# Altium PCB Dekor Natal.PcbDoc (part 1 of 2)
Units mm, origin at the board's own origin, x right, y up, seen from the top; angles counter-clockwise.
Board outline 200 x 100 mm, 4 copper layers (Top Layer, Internal Plane 1, Internal Plane 2, Bottom Layer), stack 0.462 mm thick; 210 components, 0 nets, 807 pads, 0 vias.
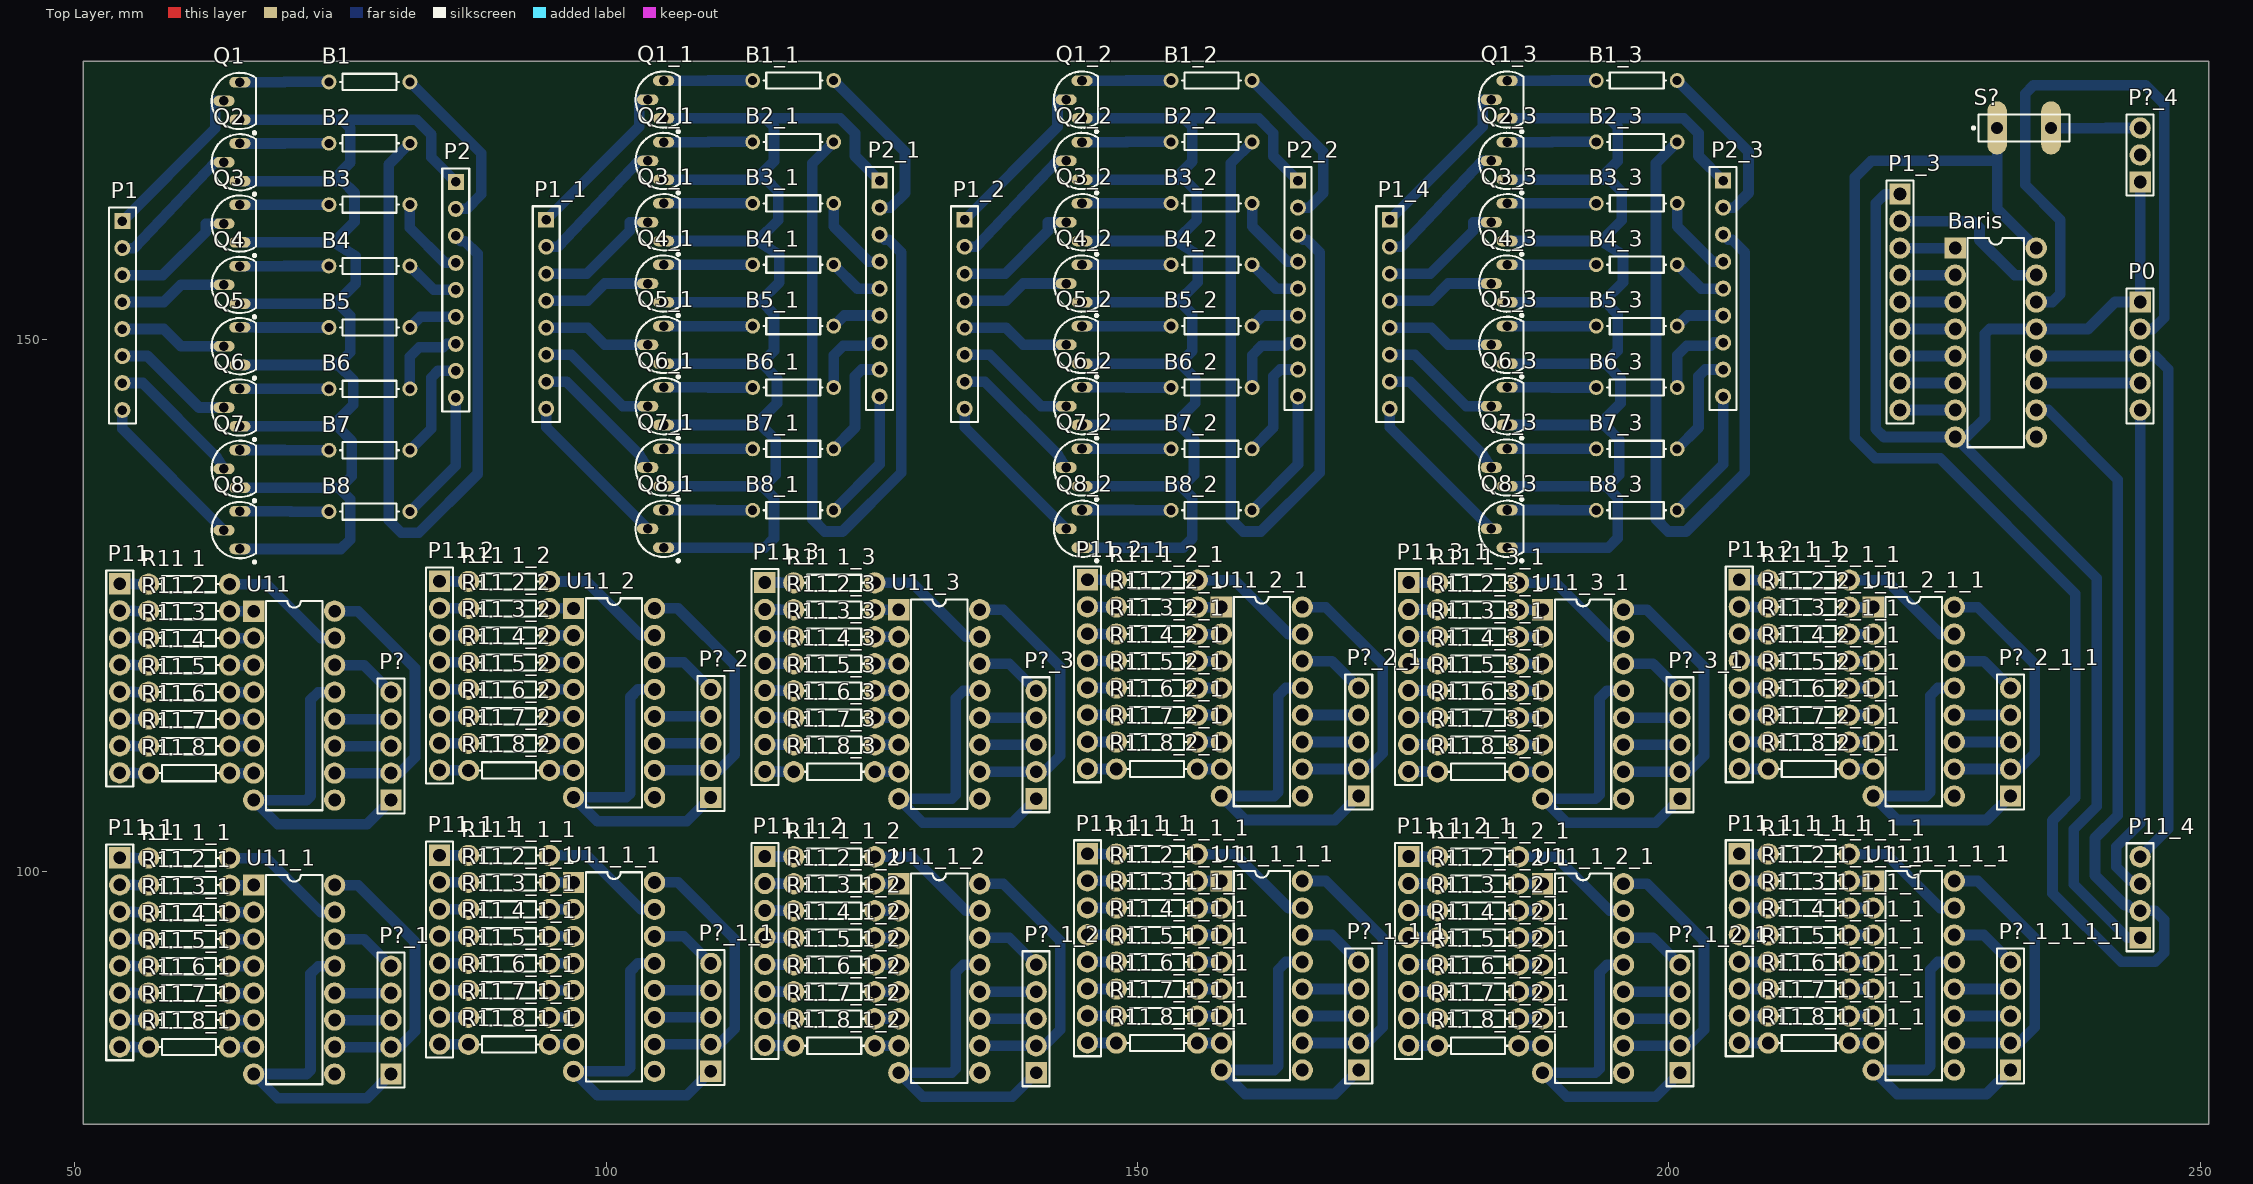
[diagram p0: Top Layer view]
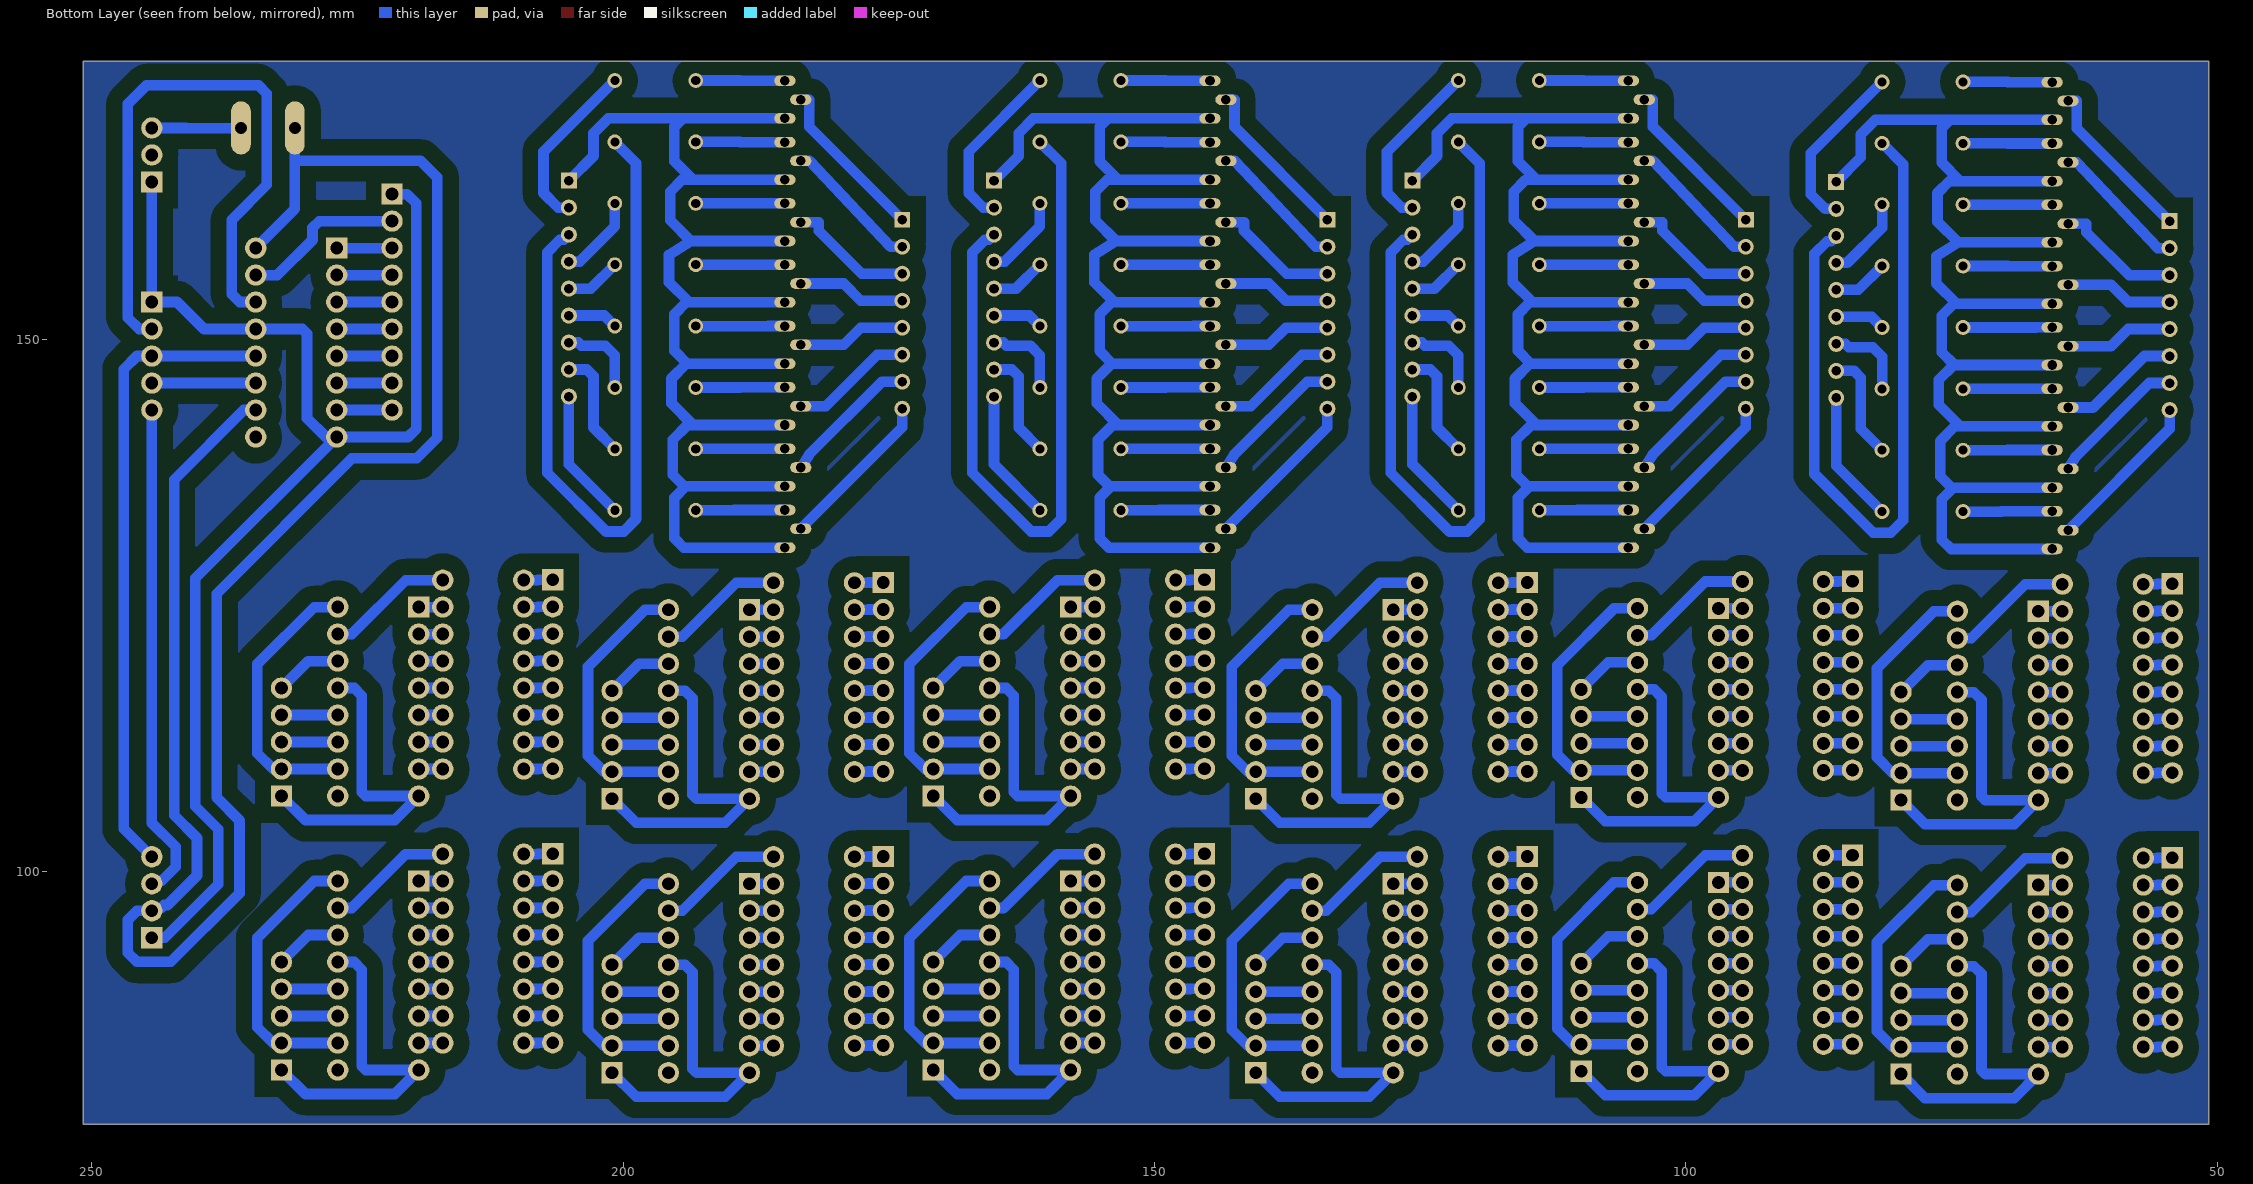
[diagram p1: Bottom Layer view, seen from below]
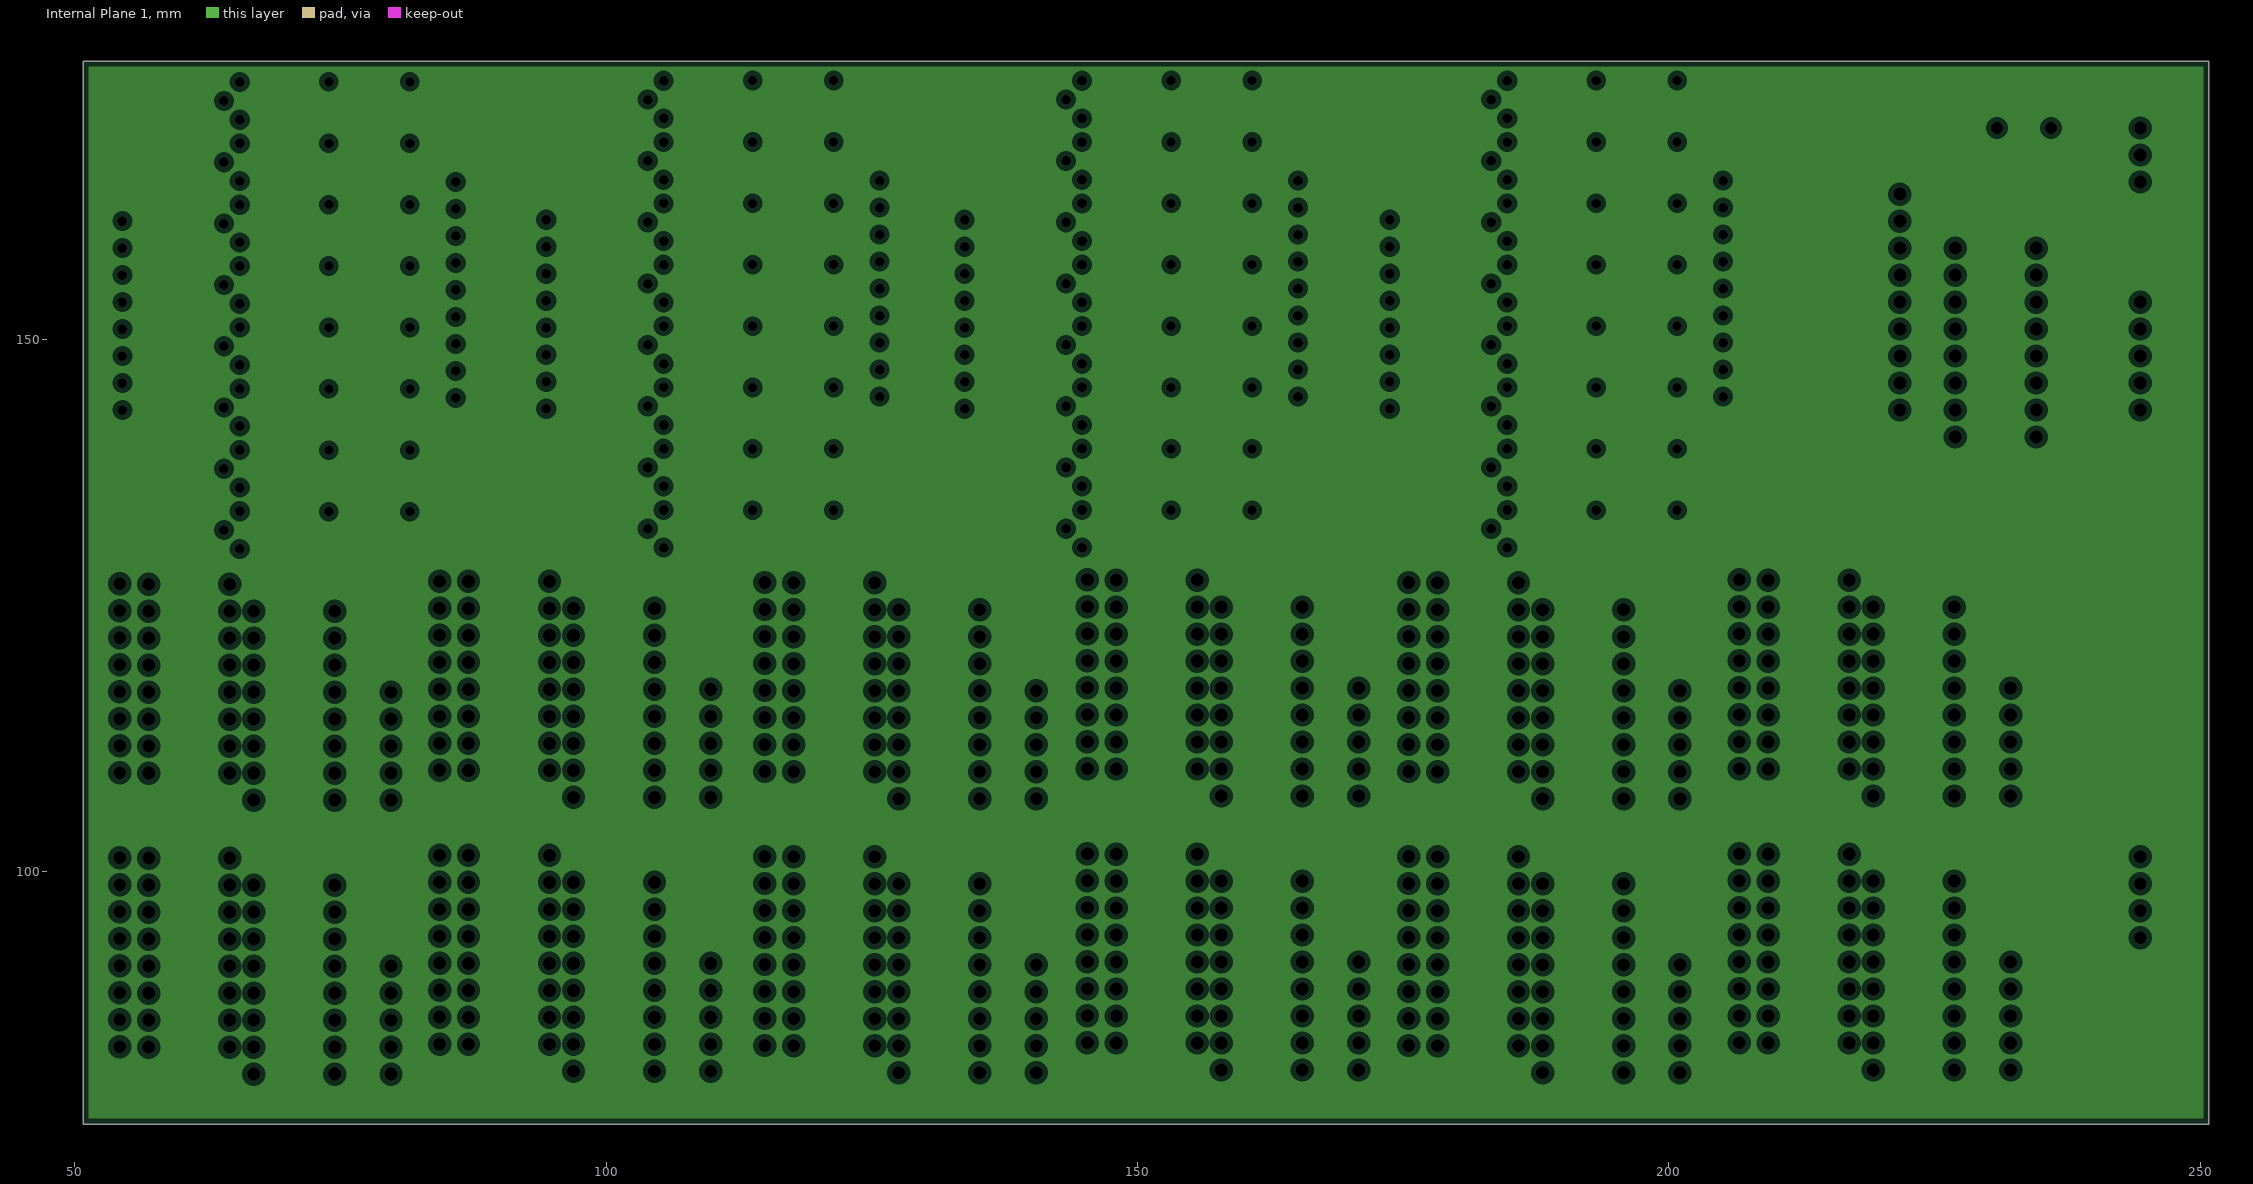
[diagram p2: Internal Plane 1, clearances drawn from the general rule]
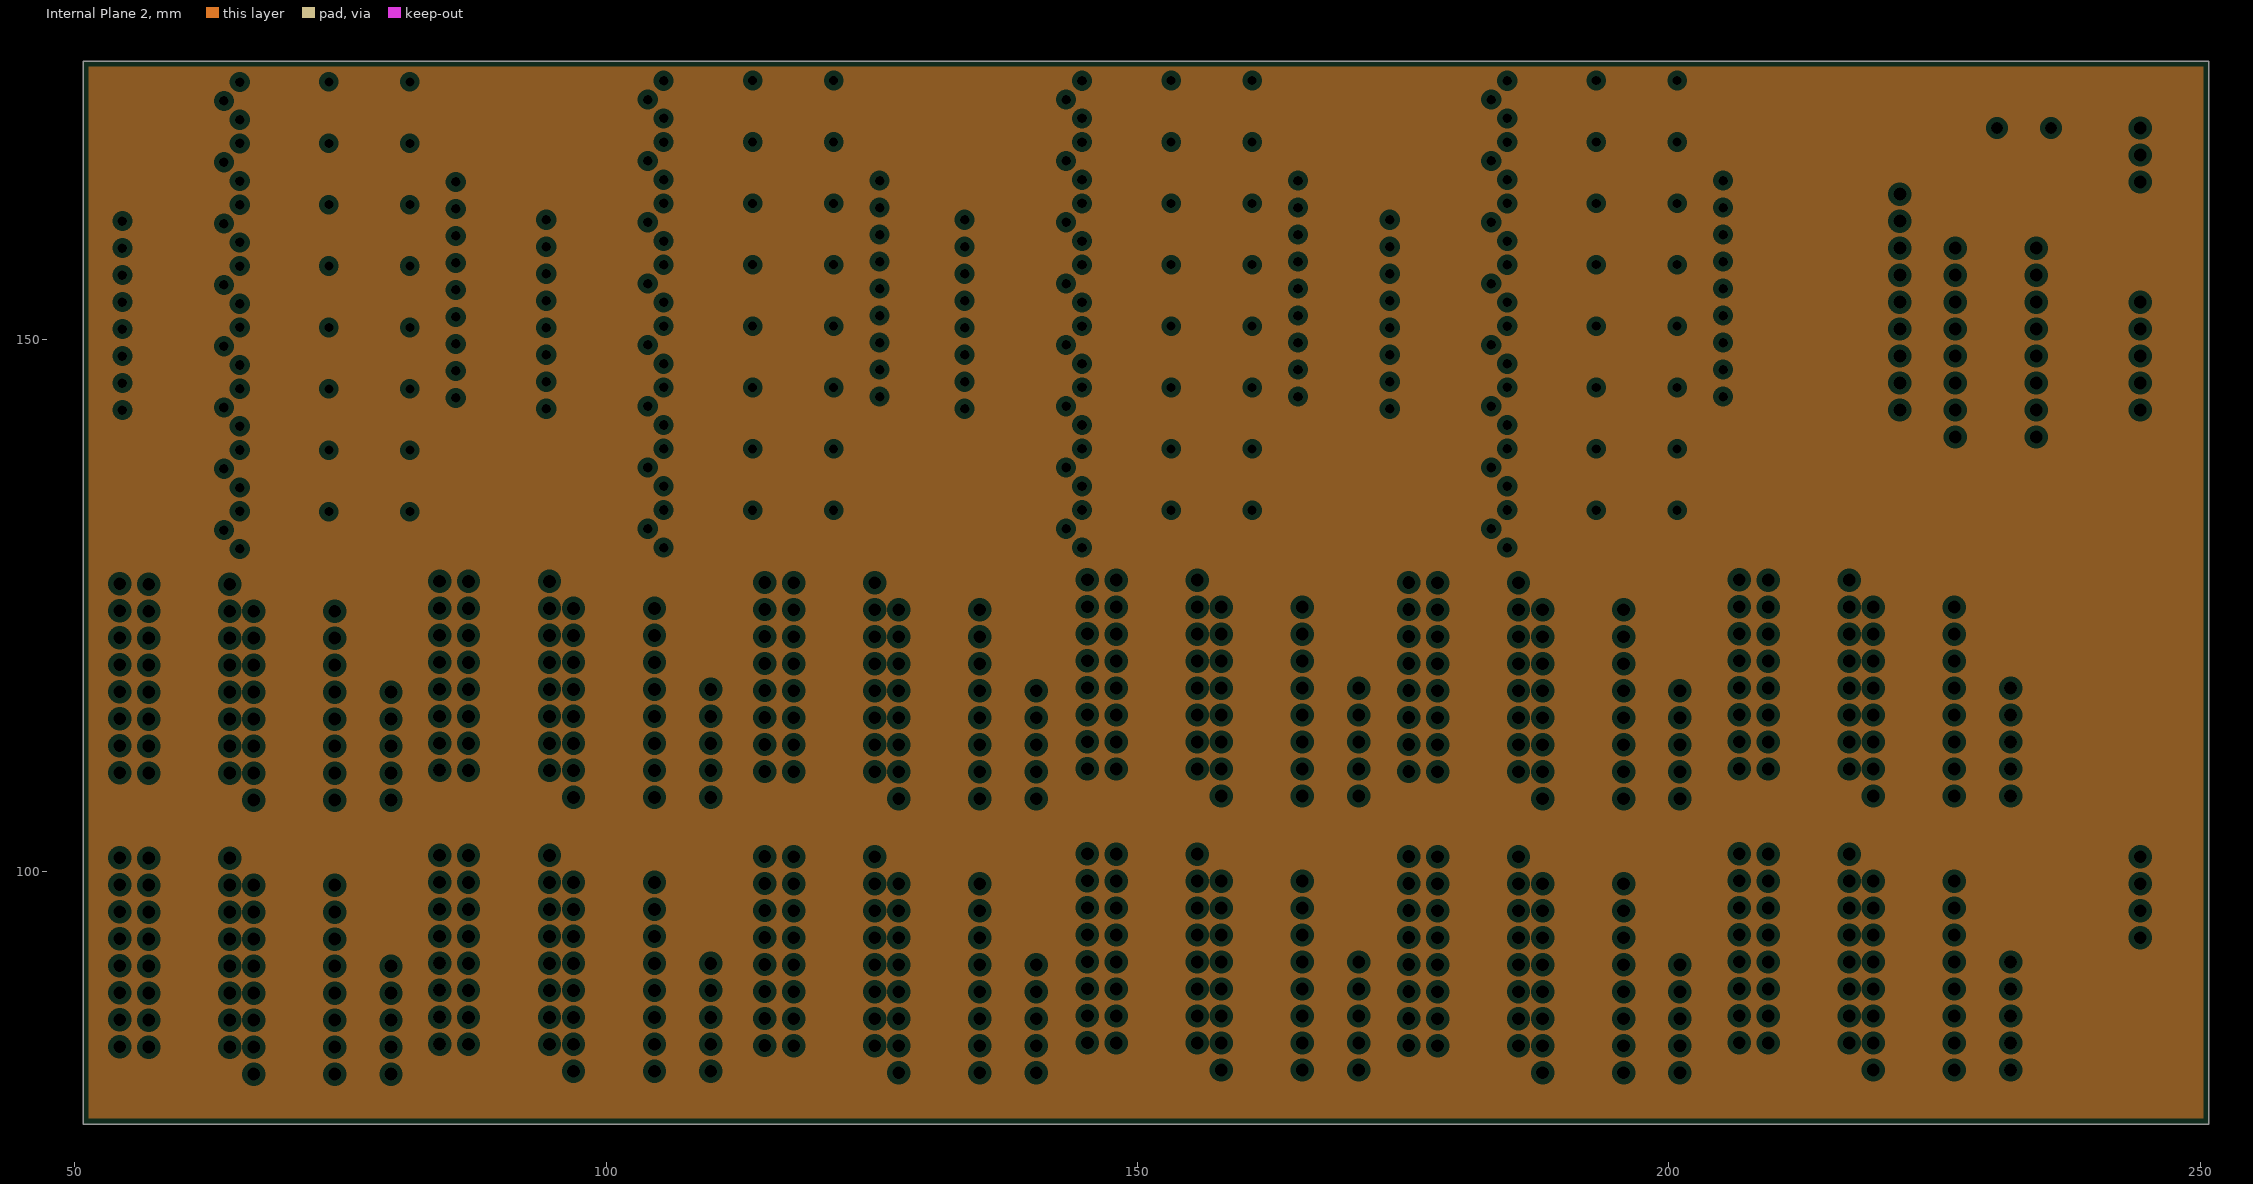
[diagram p3: Internal Plane 2, clearances drawn from the general rule]

## Layer stack, top to bottom
Top Solder: solder mask 0.0102, Solder Resist, Dk 3.5
Top Layer: signal copper 0.0356
Internal Plane 1: plane copper 0.0356
Internal Plane 2: plane copper 0.0356
Dielectric 1: dielectric 0.32, FR-4, Dk 4.8
Bottom Layer: signal copper 0.0356
Bottom Solder: solder mask 0.0102, Solder Resist, Dk 3.5

## Board outline
50.8,76.2 250.8,76.2 250.8,176.2 50.8,176.2

## Design rules (kind name [scope] priority, off if disabled: settings)
Clearance polygon [InPolygon] p1: gap=1.5
Clearance [All] p2: gap=1
PlaneClearance [All] p1: clearance=0.5
PlaneConnect [All] p1: planeconnectstyle=Relief reliefexpansion=0.508 reliefentries=4 reliefconductorwidth=0.254 reliefairgap=0.254
PolygonConnect [All] p1: connectstyle=Relief reliefconductorwidth=0.254 reliefentries=4 polygonreliefangle="90 Angle" airgapwidth=1
RoutingVias [All] p1: holewidth=0.6 width=1 viastyle="Through Hole" minholewidth=0.711 minwidth=1.27 maxholewidth=0.711 maxwidth=1.27
SolderMaskExpansion [All] p1: expansion=0.1
Width [All] p1: maxlimit=1 minlimit=0.2 preferedwidth=0.2
27 further rules are at their usual default settings.

## Components (designator, comment, footprint, x,y, rotation, side; value= is the part's Value field where it differs from the comment)
B1 "Res0" AXIAL-0.3#1 77.724,174.261 r180 top
B1_1 "Res0" AXIAL-0.3#1 117.602,174.388 r180 top (schematic designator B1)
B1_2 "Res0" AXIAL-0.3#1 156.972,174.388 r180 top (schematic designator B1)
B1_3 "Res0" AXIAL-0.3#1 196.977,174.388 r180 top (schematic designator B1)
B2 "Res0" AXIAL-0.3#1 77.724,168.484 r180 top
B2_1 "Res0" AXIAL-0.3#1 117.602,168.611 r180 top (schematic designator B2)
B2_2 "Res0" AXIAL-0.3#1 156.972,168.611 r180 top (schematic designator B2)
B2_3 "Res0" AXIAL-0.3#1 196.977,168.611 r180 top (schematic designator B2)
B3 "Res0" AXIAL-0.3#1 77.724,162.708 r180 top
B3_1 "Res0" AXIAL-0.3#1 117.602,162.835 r180 top (schematic designator B3)
B3_2 "Res0" AXIAL-0.3#1 156.972,162.835 r180 top (schematic designator B3)
B3_3 "Res0" AXIAL-0.3#1 196.977,162.835 r180 top (schematic designator B3)
B4 "Res0" AXIAL-0.3#1 77.724,156.931 r180 top
B4_1 "Res0" AXIAL-0.3#1 117.602,157.058 r180 top (schematic designator B4)
B4_2 "Res0" AXIAL-0.3#1 156.972,157.058 r180 top (schematic designator B4)
B4_3 "Res0" AXIAL-0.3#1 196.977,157.058 r180 top (schematic designator B4)
B5 "Res0" AXIAL-0.3#1 77.724,151.155 r180 top
B5_1 "Res0" AXIAL-0.3#1 117.602,151.282 r180 top (schematic designator B5)
B5_2 "Res0" AXIAL-0.3#1 156.972,151.282 r180 top (schematic designator B5)
B5_3 "Res0" AXIAL-0.3#1 196.977,151.282 r180 top (schematic designator B5)
B6 "Res0" AXIAL-0.3#1 77.724,145.378 r180 top
B6_1 "Res0" AXIAL-0.3#1 117.602,145.505 r180 top (schematic designator B6)
B6_2 "Res0" AXIAL-0.3#1 156.972,145.505 r180 top (schematic designator B6)
B6_3 "Res0" AXIAL-0.3#1 196.977,145.505 r180 top (schematic designator B6)
B7 "Res0" AXIAL-0.3#1 77.724,139.601 r180 top
B7_1 "Res0" AXIAL-0.3#1 117.602,139.728 r180 top (schematic designator B7)
B7_2 "Res0" AXIAL-0.3#1 156.972,139.728 r180 top (schematic designator B7)
B7_3 "Res0" AXIAL-0.3#1 196.977,139.728 r180 top (schematic designator B7)
B8 "Res0" AXIAL-0.3#1 77.724,133.825 r180 top
B8_1 "Res0" AXIAL-0.3#1 117.602,133.952 r180 top (schematic designator B8)
B8_2 "Res0" AXIAL-0.3#1 156.972,133.952 r180 top (schematic designator B8)
B8_3 "Res0" AXIAL-0.3#1 196.977,133.952 r180 top (schematic designator B8)
Baris "SN74HC595N" N016 230.759,149.733 r270 top
P0 "Header 5" HDR1X5 244.348,153.543 r270 top
P1 "Header 8" HDR1X8#1 54.483,161.163 r270 top
P1_1 "Header 8" HDR1X8#1 94.361,161.29 r270 top (schematic designator P1)
P1_2 "Header 8" HDR1X8#1 133.731,161.29 r270 top (schematic designator P1)
P1_3 "Header 9" HDR1X9#1 221.742,163.703 r270 top (schematic designator P1)
P1_4 "Header 8" HDR1X8#1 173.736,161.29 r270 top (schematic designator P1)
P2 "Header 9" HDR1X9#2 85.852,164.846 r270 top
P2_1 "Header 9" HDR1X9#2 125.73,164.973 r270 top (schematic designator P2)
P2_2 "Header 9" HDR1X9#2 165.1,164.973 r270 top (schematic designator P2)
P2_3 "Header 9" HDR1X9#2 205.105,164.973 r270 top (schematic designator P2)
P11 "Header 8" HDR1X8#2 54.229,127.025 r270 top
P11_1 "Header 8" HDR1X8#2 54.229,101.244 r270 top (schematic designator P11)
P11_1_1 "Header 8" HDR1X8#2 84.328,101.498 r270 top (schematic designator P11)
P11_1_1_1 "Header 8" HDR1X8#2 145.288,101.625 r270 top (schematic designator P11)
P11_1_1_1_1 "Header 8" HDR1X8#2 206.629,101.625 r270 top (schematic designator P11)
P11_1_2 "Header 8" HDR1X8#2 114.935,101.371 r270 top (schematic designator P11)
P11_1_2_1 "Header 8" HDR1X8#2 175.514,101.371 r270 top (schematic designator P11)
P11_2 "Header 8" HDR1X8#2 84.328,127.279 r270 top (schematic designator P11)
P11_2_1 "Header 8" HDR1X8#2 145.288,127.406 r270 top (schematic designator P11)
P11_2_1_1 "Header 8" HDR1X8#2 206.629,127.406 r270 top (schematic designator P11)
P11_3 "Header 8" HDR1X8#2 114.935,127.152 r270 top (schematic designator P11)
P11_3_1 "Header 8" HDR1X8#2 175.514,127.152 r270 top (schematic designator P11)
P11_4 "Header 4" HDR1X4 244.348,93.726 r90 top (schematic designator P11)
P? "Header 5" HDR1X5 79.756,106.68 r90 top
P?_1 "Header 5" HDR1X5 79.756,80.899 r90 top (schematic designator P?)
P?_1_1 "Header 5" HDR1X5 109.855,81.153 r90 top (schematic designator P?)
P?_1_1_1 "Header 5" HDR1X5 170.815,81.28 r90 top (schematic designator P?)
P?_1_1_1_1 "Header 5" HDR1X5 232.156,81.28 r90 top (schematic designator P?)
P?_1_2 "Header 5" HDR1X5 140.462,81.026 r90 top (schematic designator P?)
P?_1_2_1 "Header 5" HDR1X5 201.041,81.026 r90 top (schematic designator P?)
P?_2 "Header 5" HDR1X5 109.855,106.934 r90 top (schematic designator P?)
P?_2_1 "Header 5" HDR1X5 170.815,107.061 r90 top (schematic designator P?)
P?_2_1_1 "Header 5" HDR1X5 232.156,107.061 r90 top (schematic designator P?)
P?_3 "Header 5" HDR1X5 140.462,106.807 r90 top (schematic designator P?)
P?_3_1 "Header 5" HDR1X5 201.041,106.807 r90 top (schematic designator P?)
P?_4 "Header 3" HDR1X3 244.348,164.846 r90 top (schematic designator P?)
Q1 "NPN" TO-226-AA 65.532,172.466 r0 top
Q1_1 "NPN" TO-226-AA 105.41,172.593 r0 top (schematic designator Q1)
Q1_2 "NPN" TO-226-AA 144.78,172.593 r0 top (schematic designator Q1)
Q1_3 "NPN" TO-226-AA 184.785,172.593 r0 top (schematic designator Q1)
Q2 "NPN" TO-226-AA 65.532,166.697 r0 top
Q2_1 "NPN" TO-226-AA 105.41,166.824 r0 top (schematic designator Q2)
Q2_2 "NPN" TO-226-AA 144.78,166.824 r0 top (schematic designator Q2)
Q2_3 "NPN" TO-226-AA 184.785,166.824 r0 top (schematic designator Q2)
Q3 "NPN" TO-226-AA 65.532,160.927 r0 top
Q3_1 "NPN" TO-226-AA 105.41,161.054 r0 top (schematic designator Q3)
Q3_2 "NPN" TO-226-AA 144.78,161.054 r0 top (schematic designator Q3)
Q3_3 "NPN" TO-226-AA 184.785,161.054 r0 top (schematic designator Q3)
Q4 "NPN" TO-226-AA 65.532,155.158 r0 top
Q4_1 "NPN" TO-226-AA 105.41,155.285 r0 top (schematic designator Q4)
Q4_2 "NPN" TO-226-AA 144.78,155.285 r0 top (schematic designator Q4)
Q4_3 "NPN" TO-226-AA 184.785,155.285 r0 top (schematic designator Q4)
Q5 "NPN" TO-226-AA 65.532,149.388 r0 top
Q5_1 "NPN" TO-226-AA 105.41,149.515 r0 top (schematic designator Q5)
Q5_2 "NPN" TO-226-AA 144.78,149.515 r0 top (schematic designator Q5)
Q5_3 "NPN" TO-226-AA 184.785,149.515 r0 top (schematic designator Q5)
Q6 "NPN" TO-226-AA 65.532,143.619 r0 top
Q6_1 "NPN" TO-226-AA 105.41,143.746 r0 top (schematic designator Q6)
Q6_2 "NPN" TO-226-AA 144.78,143.746 r0 top (schematic designator Q6)
Q6_3 "NPN" TO-226-AA 184.785,143.746 r0 top (schematic designator Q6)
Q7 "NPN" TO-226-AA 65.532,137.849 r0 top
Q7_1 "NPN" TO-226-AA 105.41,137.976 r0 top (schematic designator Q7)
Q7_2 "NPN" TO-226-AA 144.78,137.976 r0 top (schematic designator Q7)
Q7_3 "NPN" TO-226-AA 184.785,137.976 r0 top (schematic designator Q7)
Q8 "NPN" TO-226-AA 65.532,132.08 r0 top
Q8_1 "NPN" TO-226-AA 105.41,132.207 r0 top (schematic designator Q8)
Q8_2 "NPN" TO-226-AA 144.78,132.207 r0 top (schematic designator Q8)
Q8_3 "NPN" TO-226-AA 184.785,132.207 r0 top (schematic designator Q8)
"R11 1" "Res0" AXIAL-0.3#2 60.762,127 r180 top
"R11 1_1" "Res0" AXIAL-0.3#2 60.762,101.219 r180 top (schematic designator "R11 1")
"R11 1_1_1" "Res0" AXIAL-0.3#2 90.861,101.473 r180 top (schematic designator "R11 1")
"R11 1_1_1_1" "Res0" AXIAL-0.3#2 151.821,101.6 r180 top (schematic designator "R11 1")
"R11 1_1_1_1_1" "Res0" AXIAL-0.3#2 213.162,101.6 r180 top (schematic designator "R11 1")
"R11 1_1_2" "Res0" AXIAL-0.3#2 121.468,101.346 r180 top (schematic designator "R11 1")
"R11 1_1_2_1" "Res0" AXIAL-0.3#2 182.047,101.346 r180 top (schematic designator "R11 1")
"R11 1_2" "Res0" AXIAL-0.3#2 90.861,127.254 r180 top (schematic designator "R11 1")
"R11 1_2_1" "Res0" AXIAL-0.3#2 151.821,127.381 r180 top (schematic designator "R11 1")
"R11 1_2_1_1" "Res0" AXIAL-0.3#2 213.162,127.381 r180 top (schematic designator "R11 1")
"R11 1_3" "Res0" AXIAL-0.3#2 121.468,127.127 r180 top (schematic designator "R11 1")
"R11 1_3_1" "Res0" AXIAL-0.3#2 182.047,127.127 r180 top (schematic designator "R11 1")
"R11 2" "Res0" AXIAL-0.3#2 60.762,124.46 r180 top
"R11 2_1" "Res0" AXIAL-0.3#2 60.762,98.679 r180 top (schematic designator "R11 2")
"R11 2_1_1" "Res0" AXIAL-0.3#2 90.861,98.933 r180 top (schematic designator "R11 2")
"R11 2_1_1_1" "Res0" AXIAL-0.3#2 151.821,99.06 r180 top (schematic designator "R11 2")
"R11 2_1_1_1_1" "Res0" AXIAL-0.3#2 213.162,99.06 r180 top (schematic designator "R11 2")
"R11 2_1_2" "Res0" AXIAL-0.3#2 121.468,98.806 r180 top (schematic designator "R11 2")
"R11 2_1_2_1" "Res0" AXIAL-0.3#2 182.047,98.806 r180 top (schematic designator "R11 2")
"R11 2_2" "Res0" AXIAL-0.3#2 90.861,124.714 r180 top (schematic designator "R11 2")
"R11 2_2_1" "Res0" AXIAL-0.3#2 151.821,124.841 r180 top (schematic designator "R11 2")
"R11 2_2_1_1" "Res0" AXIAL-0.3#2 213.162,124.841 r180 top (schematic designator "R11 2")
"R11 2_3" "Res0" AXIAL-0.3#2 121.468,124.587 r180 top (schematic designator "R11 2")
"R11 2_3_1" "Res0" AXIAL-0.3#2 182.047,124.587 r180 top (schematic designator "R11 2")
"R11 3" "Res0" AXIAL-0.3#2 60.762,121.92 r180 top
"R11 3_1" "Res0" AXIAL-0.3#2 60.762,96.139 r180 top (schematic designator "R11 3")
"R11 3_1_1" "Res0" AXIAL-0.3#2 90.861,96.393 r180 top (schematic designator "R11 3")
"R11 3_1_1_1" "Res0" AXIAL-0.3#2 151.821,96.52 r180 top (schematic designator "R11 3")
"R11 3_1_1_1_1" "Res0" AXIAL-0.3#2 213.162,96.52 r180 top (schematic designator "R11 3")
"R11 3_1_2" "Res0" AXIAL-0.3#2 121.468,96.266 r180 top (schematic designator "R11 3")
"R11 3_1_2_1" "Res0" AXIAL-0.3#2 182.047,96.266 r180 top (schematic designator "R11 3")
"R11 3_2" "Res0" AXIAL-0.3#2 90.861,122.174 r180 top (schematic designator "R11 3")
"R11 3_2_1" "Res0" AXIAL-0.3#2 151.821,122.301 r180 top (schematic designator "R11 3")
"R11 3_2_1_1" "Res0" AXIAL-0.3#2 213.162,122.301 r180 top (schematic designator "R11 3")
"R11 3_3" "Res0" AXIAL-0.3#2 121.468,122.047 r180 top (schematic designator "R11 3")
"R11 3_3_1" "Res0" AXIAL-0.3#2 182.047,122.047 r180 top (schematic designator "R11 3")
"R11 4" "Res0" AXIAL-0.3#2 60.762,119.38 r180 top
"R11 4_1" "Res0" AXIAL-0.3#2 60.762,93.599 r180 top (schematic designator "R11 4")
"R11 4_1_1" "Res0" AXIAL-0.3#2 90.861,93.853 r180 top (schematic designator "R11 4")
"R11 4_1_1_1" "Res0" AXIAL-0.3#2 151.821,93.98 r180 top (schematic designator "R11 4")
"R11 4_1_1_1_1" "Res0" AXIAL-0.3#2 213.162,93.98 r180 top (schematic designator "R11 4")
"R11 4_1_2" "Res0" AXIAL-0.3#2 121.468,93.726 r180 top (schematic designator "R11 4")
"R11 4_1_2_1" "Res0" AXIAL-0.3#2 182.047,93.726 r180 top (schematic designator "R11 4")
"R11 4_2" "Res0" AXIAL-0.3#2 90.861,119.634 r180 top (schematic designator "R11 4")
"R11 4_2_1" "Res0" AXIAL-0.3#2 151.821,119.761 r180 top (schematic designator "R11 4")
"R11 4_2_1_1" "Res0" AXIAL-0.3#2 213.162,119.761 r180 top (schematic designator "R11 4")
"R11 4_3" "Res0" AXIAL-0.3#2 121.468,119.507 r180 top (schematic designator "R11 4")
"R11 4_3_1" "Res0" AXIAL-0.3#2 182.047,119.507 r180 top (schematic designator "R11 4")
"R11 5" "Res0" AXIAL-0.3#2 60.762,116.84 r180 top
"R11 5_1" "Res0" AXIAL-0.3#2 60.762,91.059 r180 top (schematic designator "R11 5")
"R11 5_1_1" "Res0" AXIAL-0.3#2 90.861,91.313 r180 top (schematic designator "R11 5")
"R11 5_1_1_1" "Res0" AXIAL-0.3#2 151.821,91.44 r180 top (schematic designator "R11 5")
"R11 5_1_1_1_1" "Res0" AXIAL-0.3#2 213.162,91.44 r180 top (schematic designator "R11 5")
"R11 5_1_2" "Res0" AXIAL-0.3#2 121.468,91.186 r180 top (schematic designator "R11 5")
"R11 5_1_2_1" "Res0" AXIAL-0.3#2 182.047,91.186 r180 top (schematic designator "R11 5")
"R11 5_2" "Res0" AXIAL-0.3#2 90.861,117.094 r180 top (schematic designator "R11 5")
"R11 5_2_1" "Res0" AXIAL-0.3#2 151.821,117.221 r180 top (schematic designator "R11 5")
"R11 5_2_1_1" "Res0" AXIAL-0.3#2 213.162,117.221 r180 top (schematic designator "R11 5")
"R11 5_3" "Res0" AXIAL-0.3#2 121.468,116.967 r180 top (schematic designator "R11 5")
"R11 5_3_1" "Res0" AXIAL-0.3#2 182.047,116.967 r180 top (schematic designator "R11 5")
"R11 6" "Res0" AXIAL-0.3#2 60.762,114.3 r180 top
"R11 6_1" "Res0" AXIAL-0.3#2 60.762,88.519 r180 top (schematic designator "R11 6")
"R11 6_1_1" "Res0" AXIAL-0.3#2 90.861,88.773 r180 top (schematic designator "R11 6")
"R11 6_1_1_1" "Res0" AXIAL-0.3#2 151.821,88.9 r180 top (schematic designator "R11 6")
"R11 6_1_1_1_1" "Res0" AXIAL-0.3#2 213.162,88.9 r180 top (schematic designator "R11 6")
"R11 6_1_2" "Res0" AXIAL-0.3#2 121.468,88.646 r180 top (schematic designator "R11 6")
"R11 6_1_2_1" "Res0" AXIAL-0.3#2 182.047,88.646 r180 top (schematic designator "R11 6")
"R11 6_2" "Res0" AXIAL-0.3#2 90.861,114.554 r180 top (schematic designator "R11 6")
"R11 6_2_1" "Res0" AXIAL-0.3#2 151.821,114.681 r180 top (schematic designator "R11 6")
"R11 6_2_1_1" "Res0" AXIAL-0.3#2 213.162,114.681 r180 top (schematic designator "R11 6")
"R11 6_3" "Res0" AXIAL-0.3#2 121.468,114.427 r180 top (schematic designator "R11 6")
"R11 6_3_1" "Res0" AXIAL-0.3#2 182.047,114.427 r180 top (schematic designator "R11 6")
"R11 7" "Res0" AXIAL-0.3#2 60.762,111.76 r180 top
"R11 7_1" "Res0" AXIAL-0.3#2 60.762,85.979 r180 top (schematic designator "R11 7")
"R11 7_1_1" "Res0" AXIAL-0.3#2 90.861,86.233 r180 top (schematic designator "R11 7")
"R11 7_1_1_1" "Res0" AXIAL-0.3#2 151.821,86.36 r180 top (schematic designator "R11 7")
"R11 7_1_1_1_1" "Res0" AXIAL-0.3#2 213.162,86.36 r180 top (schematic designator "R11 7")
"R11 7_1_2" "Res0" AXIAL-0.3#2 121.468,86.106 r180 top (schematic designator "R11 7")
"R11 7_1_2_1" "Res0" AXIAL-0.3#2 182.047,86.106 r180 top (schematic designator "R11 7")
"R11 7_2" "Res0" AXIAL-0.3#2 90.861,112.014 r180 top (schematic designator "R11 7")
"R11 7_2_1" "Res0" AXIAL-0.3#2 151.821,112.141 r180 top (schematic designator "R11 7")
"R11 7_2_1_1" "Res0" AXIAL-0.3#2 213.162,112.141 r180 top (schematic designator "R11 7")
"R11 7_3" "Res0" AXIAL-0.3#2 121.468,111.887 r180 top (schematic designator "R11 7")
"R11 7_3_1" "Res0" AXIAL-0.3#2 182.047,111.887 r180 top (schematic designator "R11 7")
"R11 8" "Res0" AXIAL-0.3#2 60.762,109.22 r180 top
"R11 8_1" "Res0" AXIAL-0.3#2 60.762,83.439 r180 top (schematic designator "R11 8")
"R11 8_1_1" "Res0" AXIAL-0.3#2 90.861,83.693 r180 top (schematic designator "R11 8")
"R11 8_1_1_1" "Res0" AXIAL-0.3#2 151.821,83.82 r180 top (schematic designator "R11 8")
"R11 8_1_1_1_1" "Res0" AXIAL-0.3#2 213.162,83.82 r180 top (schematic designator "R11 8")
"R11 8_1_2" "Res0" AXIAL-0.3#2 121.468,83.566 r180 top (schematic designator "R11 8")
"R11 8_1_2_1" "Res0" AXIAL-0.3#2 182.047,83.566 r180 top (schematic designator "R11 8")
"R11 8_2" "Res0" AXIAL-0.3#2 90.861,109.474 r180 top (schematic designator "R11 8")
"R11 8_2_1" "Res0" AXIAL-0.3#2 151.821,109.601 r180 top (schematic designator "R11 8")
"R11 8_2_1_1" "Res0" AXIAL-0.3#2 213.162,109.601 r180 top (schematic designator "R11 8")
"R11 8_3" "Res0" AXIAL-0.3#2 121.468,109.347 r180 top (schematic designator "R11 8")
"R11 8_3_1" "Res0" AXIAL-0.3#2 182.047,109.347 r180 top (schematic designator "R11 8")
S? "SW-SPST" SPST-2 233.426,169.926 r0 top
U11 "SN74HC595N" N016 70.643,115.57 r270 top
U11_1 "SN74HC595N" N016 70.643,89.789 r270 top (schematic designator U11)
U11_1_1 "SN74HC595N" N016 100.742,90.043 r270 top (schematic designator U11)
U11_1_1_1 "SN74HC595N" N016 161.702,90.17 r270 top (schematic designator U11)
U11_1_1_1_1 "SN74HC595N" N016 223.043,90.17 r270 top (schematic designator U11)
U11_1_2 "SN74HC595N" N016 131.349,89.916 r270 top (schematic designator U11)
U11_1_2_1 "SN74HC595N" N016 191.928,89.916 r270 top (schematic designator U11)
U11_2 "SN74HC595N" N016 100.742,115.824 r270 top (schematic designator U11)
U11_2_1 "SN74HC595N" N016 161.702,115.951 r270 top (schematic designator U11)
U11_2_1_1 "SN74HC595N" N016 223.043,115.951 r270 top (schematic designator U11)
U11_3 "SN74HC595N" N016 131.349,115.697 r270 top (schematic designator U11)
U11_3_1 "SN74HC595N" N016 191.928,115.697 r270 top (schematic designator U11)

## Footprints (in the part's own frame and the unit in brackets; to place one, negate y for a bottom-side part, rotate by r counter-clockwise, add the part's x,y. Pads: shape width x height; smd on the part's side, far side on the other; paste and mask are expansions set on the pad)
AXIAL-0.3#1 [mm] "Axial Device, Thru-Hole; 2 Leads; 0.3 in Pin Spacing"
  round 1.4 hole 0.85: 1(-3.81,0) 2(3.81,0)
  silkscreen extent -2.77,-0.76 2.77,0.76
AXIAL-0.3#2 [mm] "Axial Device, Thru-Hole; 2 Leads; 0.3 in Pin Spacing"
  round 2 hole 1.2: 1(-3.81,0) 2(3.81,0)
  silkscreen extent -2.77,-0.76 2.77,0.76
HDR1X3 [mm] "Connector; Header; 3 Position"
  rect 2x2 hole 1.2: 1(0,0)
  round 2 hole 1.2: 2(2.54,0) 3(5.08,0)
  silkscreen extent -1.27,-1.27 6.35,1.27
HDR1X4 [mm] "Connector; Header; 4 Position"
  rect 2x2 hole 1.2: 1(0,0)
  round 2 hole 1.2: 2(2.54,0) 3(5.08,0) 4(7.62,0)
  silkscreen extent -1.27,-1.27 8.89,1.27
HDR1X5 [mm] "Connector; Header; 5 Position"
  rect 2x2 hole 1.2: 1(0,0)
  round 2 hole 1.2: 2(2.54,0) 3(5.08,0) 4(7.62,0) 5(10.16,0)
  silkscreen extent -1.27,-1.27 11.43,1.27
HDR1X8#1 [mm] "Connector; Header; 8 Position"
  rect 1.5x1.5 hole 0.9: 1(0,0)
  round 1.5 hole 0.9: 2(2.54,0) 3(5.08,0) 4(7.62,0) 5(10.16,0) 6(12.7,0) 7(15.24,0) 8(17.78,0)
  silkscreen extent -1.27,-1.27 19.05,1.27
HDR1X8#2 [mm] "Connector; Header; 8 Position"
  rect 2x2 hole 1.2: 1(0,0)
  round 2 hole 1.2: 2(2.54,0) 3(5.08,0) 4(7.62,0) 5(10.16,0) 6(12.7,0) 7(15.24,0) 8(17.78,0)
  silkscreen extent -1.27,-1.27 19.05,1.27
HDR1X9#1 [mm] "Connector; Header; 9 Position"
  rect 2x2 hole 1.2: 1(0,0)
  round 2 hole 1.2: 2(2.54,0) 3(5.08,0) 4(7.62,0) 5(10.16,0) 6(12.7,0) 7(15.24,0) 8(17.78,0) 9(20.32,0)
  silkscreen extent -1.27,-1.27 21.59,1.27
HDR1X9#2 [mm] "Connector; Header; 9 Position"
  rect 1.5x1.5 hole 0.9: 1(0,0)
  round 1.5 hole 0.9: 2(2.54,0) 3(5.08,0) 4(7.62,0) 5(10.16,0) 6(12.7,0) 7(15.24,0) 8(17.78,0) 9(20.32,0)
  silkscreen extent -1.27,-1.27 21.59,1.27
N016 [mm] "DIP; 16 Leads; Row Spacing 7.62 mm; Pitch 2.54 mm"
  rect 2x2 hole 1.2: 1(-8.89,-3.81)
  round 2 hole 1.2: 2(-6.35,-3.81) 3(-3.81,-3.81) 4(-1.27,-3.81) 5(1.27,-3.81) 6(3.81,-3.81) 7(6.35,-3.81) 8(8.89,-3.81) 9(8.89,3.81) 10(6.35,3.81) 11(3.81,3.81) 12(1.27,3.81) 13(-1.27,3.81) 14(-3.81,3.81) 15(-6.35,3.81) 16(-8.89,3.81)
  silkscreen extent -9.85,-2.65 9.85,2.65
SPST-2 [mm] "Switch; 2 Leads"
  oval 1.85x5 hole 1.1: 1(-2.54,0) 2(2.54,0)
  silkscreen extent -4.89,-1.27 4.28,1.27
TO-226-AA [mm] "TO, Flat Index; 3 In-Line, Axial Leads; Body Dia. 4.8mm; Leads 0.55 x 0.51 mm (max)"
  oval 2x1 hole 0.9: 1(0,-1.77) 2(-1.5,0) 3(0,1.77)
  silkscreen extent -2.65,-3.13 1.52,2.65, body extent -2.66,-2.66 1.52,2.66, height 5.33

## Part data
B1 B1_1 B1_2 B1_3 B2 B2_1 B2_2 B2_3 B3 B3_1 B3_2 B3_3 B4 B4_1 B4_2 B4_3 B5 B5_1 B5_2 B5_3 B6 B6_1 B6_2 B6_3 B7 B7_1 B7_2 B7_3 B8 B8_1 B8_2 B8_3 "R11 1" "R11 1_1" "R11 1_1_1" "R11 1_1_1_1" "R11 1_1_1_1_1" "R11 1_1_2" "R11 1_1_2_1" "R11 1_2" "R11 1_2_1" "R11 1_2_1_1" "R11 1_3" "R11 1_3_1" "R11 2" "R11 2_1" "R11 2_1_1" "R11 2_1_1_1" "R11 2_1_1_1_1" "R11 2_1_2" "R11 2_1_2_1" "R11 2_2" "R11 2_2_1" "R11 2_2_1_1" "R11 2_3" "R11 2_3_1" "R11 3" "R11 3_1" "R11 3_1_1" "R11 3_1_1_1" "R11 3_1_1_1_1" "R11 3_1_2" "R11 3_1_2_1" "R11 3_2" "R11 3_2_1" "R11 3_2_1_1" "R11 3_3" "R11 3_3_1" "R11 4" "R11 4_1" "R11 4_1_1" "R11 4_1_1_1" "R11 4_1_1_1_1" "R11 4_1_2" "R11 4_1_2_1" "R11 4_2" "R11 4_2_1" "R11 4_2_1_1" "R11 4_3" "R11 4_3_1" "R11 5" "R11 5_1" "R11 5_1_1" "R11 5_1_1_1" "R11 5_1_1_1_1" "R11 5_1_2" "R11 5_1_2_1" "R11 5_2" "R11 5_2_1" "R11 5_2_1_1" "R11 5_3" "R11 5_3_1" "R11 6" "R11 6_1" "R11 6_1_1" "R11 6_1_1_1" "R11 6_1_1_1_1" "R11 6_1_2" "R11 6_1_2_1" "R11 6_2" "R11 6_2_1" "R11 6_2_1_1" "R11 6_3" "R11 6_3_1" "R11 7" "R11 7_1" "R11 7_1_1" "R11 7_1_1_1" "R11 7_1_1_1_1" "R11 7_1_2" "R11 7_1_2_1" "R11 7_2" "R11 7_2_1" "R11 7_2_1_1" "R11 7_3" "R11 7_3_1" "R11 8" "R11 8_1" "R11 8_1_1" "R11 8_1_1_1" "R11 8_1_1_1_1" "R11 8_1_2" "R11 8_1_2_1" "R11 8_2" "R11 8_2_1" "R11 8_2_1_1" "R11 8_3" "R11 8_3_1": library part Res1, "Resistor"
Baris U11 U11_1 U11_1_1 U11_1_1_1 U11_1_1_1_1 U11_1_2 U11_1_2_1 U11_2 U11_2_1 U11_2_1_1 U11_3 U11_3_1: "8-Bit Shift Register with 3-State Output Registers"
P0 P? P?_1 P?_1_1 P?_1_1_1 P?_1_1_1_1 P?_1_2 P?_1_2_1 P?_2 P?_2_1 P?_2_1_1 P?_3 P?_3_1: "Header, 5-Pin"
P1 P1_1 P1_2 P1_4 P11 P11_1 P11_1_1 P11_1_1_1 P11_1_1_1_1 P11_1_2 P11_1_2_1 P11_2 P11_2_1 P11_2_1_1 P11_3 P11_3_1: "Header, 8-Pin"
P1_3 P2 P2_1 P2_2 P2_3: "Header, 9-Pin"
P11_4: "Header, 4-Pin"
P?_4: "Header, 3-Pin"
Q1 Q1_1 Q1_2 Q1_3 Q2 Q2_1 Q2_2 Q2_3 Q3 Q3_1 Q3_2 Q3_3 Q4 Q4_1 Q4_2 Q4_3 Q5 Q5_1 Q5_2 Q5_3 Q6 Q6_1 Q6_2 Q6_3 Q7 Q7_1 Q7_2 Q7_3 Q8 Q8_1 Q8_2 Q8_3: "NPN Bipolar Transistor"
S?: "Single-Pole, Single-Throw Switch"

## Nets (pads, with @x,y where several pads share a name; then routed paths per layer and width w, separated by ;. In a path a pad name is that pad's centre, name@x,y a point inside that pad or via, vN(x,y) a via of type N, cw(c..) or ccw(c..) an arc to the next point about the centre after c; other vN are vias at no path point)
pads on no net: "R11 1.1" "R11 1.2" "R11 1_1.1" "R11 1_1.2" "R11 1_1_1.1" "R11 1_1_1.2" "R11 1_1_1_1.1" "R11 1_1_1_1.2" "R11 1_1_1_1_1.1" "R11 1_1_1_1_1.2" "R11 1_1_2.1" "R11 1_1_2.2" "R11 1_1_2_1.1" "R11 1_1_2_1.2" "R11 1_2.1" "R11 1_2.2" "R11 1_2_1.1" "R11 1_2_1.2" "R11 1_2_1_1.1" "R11 1_2_1_1.2" "R11 1_3.1" "R11 1_3.2" "R11 1_3_1.1" "R11 1_3_1.2" "R11 2.1" "R11 2.2" "R11 2_1.1" "R11 2_1.2" "R11 2_1_1.1" "R11 2_1_1.2" "R11 2_1_1_1.1" "R11 2_1_1_1.2" "R11 2_1_1_1_1.1" "R11 2_1_1_1_1.2" "R11 2_1_2.1" "R11 2_1_2.2" "R11 2_1_2_1.1" "R11 2_1_2_1.2" "R11 2_2.1" "R11 2_2.2" "R11 2_2_1.1" "R11 2_2_1.2" "R11 2_2_1_1.1" "R11 2_2_1_1.2" "R11 2_3.1" "R11 2_3.2" "R11 2_3_1.1" "R11 2_3_1.2" "R11 3.1" "R11 3.2" "R11 3_1.1" "R11 3_1.2" "R11 3_1_1.1" "R11 3_1_1.2" "R11 3_1_1_1.1" "R11 3_1_1_1.2" "R11 3_1_1_1_1.1" "R11 3_1_1_1_1.2" "R11 3_1_2.1" "R11 3_1_2.2" "R11 3_1_2_1.1" "R11 3_1_2_1.2" "R11 3_2.1" "R11 3_2.2" "R11 3_2_1.1" "R11 3_2_1.2" "R11 3_2_1_1.1" "R11 3_2_1_1.2" "R11 3_3.1" "R11 3_3.2" "R11 3_3_1.1" "R11 3_3_1.2" "R11 4.1" "R11 4.2" "R11 4_1.1" "R11 4_1.2" "R11 4_1_1.1" "R11 4_1_1.2" "R11 4_1_1_1.1" "R11 4_1_1_1.2" "R11 4_1_1_1_1.1" "R11 4_1_1_1_1.2" "R11 4_1_2.1" "R11 4_1_2.2" "R11 4_1_2_1.1" "R11 4_1_2_1.2" "R11 4_2.1" "R11 4_2.2" "R11 4_2_1.1" "R11 4_2_1.2" "R11 4_2_1_1.1" "R11 4_2_1_1.2" "R11 4_3.1" "R11 4_3.2" "R11 4_3_1.1" "R11 4_3_1.2" "R11 5.1" "R11 5.2" "R11 5_1.1" "R11 5_1.2" "R11 5_1_1.1" "R11 5_1_1.2" "R11 5_1_1_1.1" "R11 5_1_1_1.2" "R11 5_1_1_1_1.1" "R11 5_1_1_1_1.2" "R11 5_1_2.1" "R11 5_1_2.2" "R11 5_1_2_1.1" "R11 5_1_2_1.2" "R11 5_2.1" "R11 5_2.2" "R11 5_2_1.1" "R11 5_2_1.2" "R11 5_2_1_1.1" "R11 5_2_1_1.2" "R11 5_3.1" "R11 5_3.2" "R11 5_3_1.1" "R11 5_3_1.2" "R11 6.1" "R11 6.2" "R11 6_1.1" "R11 6_1.2" "R11 6_1_1.1" "R11 6_1_1.2" "R11 6_1_1_1.1" "R11 6_1_1_1.2" "R11 6_1_1_1_1.1" "R11 6_1_1_1_1.2" "R11 6_1_2.1" "R11 6_1_2.2" "R11 6_1_2_1.1" "R11 6_1_2_1.2" "R11 6_2.1" "R11 6_2.2" "R11 6_2_1.1" "R11 6_2_1.2" "R11 6_2_1_1.1" "R11 6_2_1_1.2" "R11 6_3.1" "R11 6_3.2" "R11 6_3_1.1" "R11 6_3_1.2" "R11 7.1" "R11 7.2" "R11 7_1.1" "R11 7_1.2" "R11 7_1_1.1" "R11 7_1_1.2" "R11 7_1_1_1.1" "R11 7_1_1_1.2" "R11 7_1_1_1_1.1" "R11 7_1_1_1_1.2" "R11 7_1_2.1" "R11 7_1_2.2" "R11 7_1_2_1.1" "R11 7_1_2_1.2" "R11 7_2.1" "R11 7_2.2" "R11 7_2_1.1" "R11 7_2_1.2" "R11 7_2_1_1.1" "R11 7_2_1_1.2" "R11 7_3.1" "R11 7_3.2" "R11 7_3_1.1" "R11 7_3_1.2" "R11 8.1" "R11 8.2" "R11 8_1.1" "R11 8_1.2" "R11 8_1_1.1" "R11 8_1_1.2" "R11 8_1_1_1.1" "R11 8_1_1_1.2" "R11 8_1_1_1_1.1" "R11 8_1_1_1_1.2" "R11 8_1_2.1" "R11 8_1_2.2" "R11 8_1_2_1.1" "R11 8_1_2_1.2" "R11 8_2.1" "R11 8_2.2" "R11 8_2_1.1" "R11 8_2_1.2" "R11 8_2_1_1.1" "R11 8_2_1_1.2" "R11 8_3.1" "R11 8_3.2" "R11 8_3_1.1" "R11 8_3_1.2" B1.1 B1.2 B1_1.1 B1_1.2 B1_2.1 B1_2.2 B1_3.1 B1_3.2 B2.1 B2.2 B2_1.1 B2_1.2 B2_2.1 B2_2.2 B2_3.1 B2_3.2 B3.1 B3.2 B3_1.1 B3_1.2 B3_2.1 B3_2.2 B3_3.1 B3_3.2 B4.1 B4.2 B4_1.1 B4_1.2 B4_2.1 B4_2.2 B4_3.1 B4_3.2 B5.1 B5.2 B5_1.1 B5_1.2 B5_2.1 B5_2.2 B5_3.1 B5_3.2 B6.1 B6.2 B6_1.1 B6_1.2 B6_2.1 B6_2.2 B6_3.1 B6_3.2 B7.1 B7.2 B7_1.1 B7_1.2 B7_2.1 B7_2.2 B7_3.1 B7_3.2 B8.1 B8.2 B8_1.1 B8_1.2 B8_2.1 B8_2.2 B8_3.1 B8_3.2 Baris.1 Baris.2 Baris.3 Baris.4 Baris.5 Baris.6 Baris.7 Baris.8 Baris.9 Baris.10 Baris.11 Baris.12 Baris.13 Baris.14 Baris.15 Baris.16 P0.1 P0.2 P0.3 P0.4 P0.5 P1.1 P1.2 P1.3 P1.4 P1.5 P1.6 P1.7 P1.8 P1_1.1 P1_1.2 P1_1.3 P1_1.4 P1_1.5 P1_1.6 P1_1.7 P1_1.8 P1_2.1 P1_2.2 P1_2.3 P1_2.4 P1_2.5 P1_2.6 P1_2.7 P1_2.8 P1_3.1 P1_3.2 P1_3.3 P1_3.4 P1_3.5 P1_3.6 P1_3.7 P1_3.8 P1_3.9 P1_4.1 P1_4.2 P1_4.3 P1_4.4 P1_4.5 P1_4.6 P1_4.7 P1_4.8 P2.1 P2.2 P2.3 P2.4 P2.5 P2.6 P2.7 P2.8 P2.9 P2_1.1 P2_1.2 P2_1.3 P2_1.4 P2_1.5 P2_1.6 P2_1.7 P2_1.8 P2_1.9 P2_2.1 P2_2.2 P2_2.3 P2_2.4 P2_2.5 P2_2.6 P2_2.7 P2_2.8 P2_2.9 P2_3.1 P2_3.2 P2_3.3 P2_3.4 P2_3.5 P2_3.6 P2_3.7 P2_3.8 P2_3.9 P11.1 P11.2 P11.3 P11.4 P11.5 P11.6 P11.7 P11.8 P11_1.1 P11_1.2 P11_1.3 P11_1.4 P11_1.5 P11_1.6 P11_1.7 P11_1.8 P11_1_1.1 P11_1_1.2 P11_1_1.3 P11_1_1.4 P11_1_1.5 P11_1_1.6 P11_1_1.7 P11_1_1.8 P11_1_1_1.1 P11_1_1_1.2 P11_1_1_1.3 P11_1_1_1.4 P11_1_1_1.5 P11_1_1_1.6 P11_1_1_1.7 P11_1_1_1.8 P11_1_1_1_1.1 P11_1_1_1_1.2 P11_1_1_1_1.3 P11_1_1_1_1.4 P11_1_1_1_1.5 P11_1_1_1_1.6 P11_1_1_1_1.7 P11_1_1_1_1.8 P11_1_2.1 P11_1_2.2 P11_1_2.3 P11_1_2.4 P11_1_2.5 P11_1_2.6 P11_1_2.7 P11_1_2.8 P11_1_2_1.1 P11_1_2_1.2 P11_1_2_1.3 P11_1_2_1.4 P11_1_2_1.5 P11_1_2_1.6 P11_1_2_1.7 P11_1_2_1.8 P11_2.1 P11_2.2 P11_2.3 P11_2.4 P11_2.5 P11_2.6 P11_2.7 P11_2.8 P11_2_1.1 P11_2_1.2 P11_2_1.3 P11_2_1.4 P11_2_1.5 P11_2_1.6 P11_2_1.7 P11_2_1.8 P11_2_1_1.1 P11_2_1_1.2 P11_2_1_1.3 P11_2_1_1.4 P11_2_1_1.5 P11_2_1_1.6 P11_2_1_1.7 P11_2_1_1.8 P11_3.1 P11_3.2 P11_3.3 P11_3.4 P11_3.5 P11_3.6 P11_3.7 P11_3.8 P11_3_1.1 P11_3_1.2 P11_3_1.3 P11_3_1.4 P11_3_1.5 P11_3_1.6 P11_3_1.7 P11_3_1.8 P11_4.1 P11_4.2 P11_4.3 P11_4.4 P?.1 P?.2 P?.3 P?.4 P?.5 P?_1.1 P?_1.2 P?_1.3 P?_1.4 P?_1.5 P?_1_1.1 P?_1_1.2 P?_1_1.3 P?_1_1.4 P?_1_1.5 P?_1_1_1.1 P?_1_1_1.2 P?_1_1_1.3 P?_1_1_1.4 P?_1_1_1.5 P?_1_1_1_1.1 P?_1_1_1_1.2 P?_1_1_1_1.3 P?_1_1_1_1.4 P?_1_1_1_1.5 P?_1_2.1 P?_1_2.2 P?_1_2.3 P?_1_2.4 P?_1_2.5 P?_1_2_1.1 P?_1_2_1.2 P?_1_2_1.3 P?_1_2_1.4 P?_1_2_1.5 P?_2.1 P?_2.2 P?_2.3 P?_2.4 P?_2.5 P?_2_1.1 P?_2_1.2 P?_2_1.3 P?_2_1.4 P?_2_1.5 P?_2_1_1.1 P?_2_1_1.2 P?_2_1_1.3 P?_2_1_1.4 P?_2_1_1.5 P?_3.1 P?_3.2 P?_3.3 P?_3.4 P?_3.5 P?_3_1.1 P?_3_1.2 P?_3_1.3 P?_3_1.4 P?_3_1.5 P?_4.1 P?_4.2 P?_4.3 Q1.1 Q1.2 Q1.3 Q1_1.1 Q1_1.2 Q1_1.3 Q1_2.1 Q1_2.2 Q1_2.3 Q1_3.1 Q1_3.2 Q1_3.3 Q2.1 Q2.2 Q2.3 Q2_1.1 Q2_1.2 Q2_1.3 Q2_2.1 Q2_2.2 Q2_2.3 Q2_3.1 Q2_3.2 Q2_3.3 Q3.1 Q3.2 Q3.3 Q3_1.1 Q3_1.2 Q3_1.3 Q3_2.1 Q3_2.2 Q3_2.3 Q3_3.1 Q3_3.2 Q3_3.3 Q4.1 Q4.2 Q4.3 Q4_1.1 Q4_1.2 Q4_1.3 Q4_2.1 Q4_2.2 Q4_2.3 Q4_3.1 Q4_3.2 Q4_3.3 Q5.1 Q5.2 Q5.3 Q5_1.1 Q5_1.2 Q5_1.3 Q5_2.1 Q5_2.2 Q5_2.3 Q5_3.1 Q5_3.2 Q5_3.3 Q6.1 Q6.2 Q6.3 Q6_1.1 Q6_1.2 Q6_1.3 Q6_2.1 Q6_2.2 Q6_2.3 Q6_3.1 Q6_3.2 Q6_3.3 Q7.1 Q7.2 Q7.3 Q7_1.1 Q7_1.2 Q7_1.3 Q7_2.1 Q7_2.2 Q7_2.3 Q7_3.1 Q7_3.2 Q7_3.3 Q8.1 Q8.2 Q8.3 Q8_1.1 Q8_1.2 Q8_1.3 Q8_2.1 Q8_2.2 Q8_2.3 Q8_3.1 Q8_3.2 Q8_3.3 S?.1 S?.2 U11.1 U11.2 U11.3 U11.4 U11.5 U11.6 U11.7 U11.8 U11.9 U11.10 U11.11 U11.12 U11.13 U11.14 U11.15 U11.16 U11_1.1 U11_1.2 U11_1.3 U11_1.4 U11_1.5 U11_1.6 U11_1.7 U11_1.8 U11_1.9 U11_1.10 U11_1.11 U11_1.12 U11_1.13 U11_1.14 U11_1.15 U11_1.16 U11_1_1.1 U11_1_1.2 U11_1_1.3 U11_1_1.4 U11_1_1.5 U11_1_1.6 U11_1_1.7 U11_1_1.8 U11_1_1.9 U11_1_1.10 U11_1_1.11 U11_1_1.12 U11_1_1.13 U11_1_1.14 U11_1_1.15 U11_1_1.16 U11_1_1_1.1 U11_1_1_1.2 U11_1_1_1.3 U11_1_1_1.4 U11_1_1_1.5 U11_1_1_1.6 U11_1_1_1.7 U11_1_1_1.8 U11_1_1_1.9 U11_1_1_1.10 U11_1_1_1.11 U11_1_1_1.12 U11_1_1_1.13 U11_1_1_1.14 U11_1_1_1.15 U11_1_1_1.16 U11_1_1_1_1.1 U11_1_1_1_1.2 U11_1_1_1_1.3 U11_1_1_1_1.4 U11_1_1_1_1.5 U11_1_1_1_1.6 U11_1_1_1_1.7 U11_1_1_1_1.8 U11_1_1_1_1.9 U11_1_1_1_1.10 U11_1_1_1_1.11 U11_1_1_1_1.12 U11_1_1_1_1.13 U11_1_1_1_1.14 U11_1_1_1_1.15 U11_1_1_1_1.16 U11_1_2.1 U11_1_2.2 U11_1_2.3 U11_1_2.4 U11_1_2.5 U11_1_2.6 U11_1_2.7 U11_1_2.8 U11_1_2.9 U11_1_2.10 U11_1_2.11 U11_1_2.12 U11_1_2.13 U11_1_2.14 U11_1_2.15 U11_1_2.16 U11_1_2_1.1 U11_1_2_1.2 U11_1_2_1.3 U11_1_2_1.4 U11_1_2_1.5 U11_1_2_1.6 U11_1_2_1.7 U11_1_2_1.8 U11_1_2_1.9 U11_1_2_1.10 U11_1_2_1.11 U11_1_2_1.12 U11_1_2_1.13 U11_1_2_1.14 U11_1_2_1.15 U11_1_2_1.16 U11_2.1 U11_2.2 U11_2.3 U11_2.4 U11_2.5 U11_2.6 U11_2.7 U11_2.8 U11_2.9 U11_2.10 U11_2.11 U11_2.12 U11_2.13 U11_2.14 U11_2.15 U11_2.16 U11_2_1.1 U11_2_1.2 U11_2_1.3 U11_2_1.4 U11_2_1.5 U11_2_1.6 U11_2_1.7 U11_2_1.8 U11_2_1.9 U11_2_1.10 U11_2_1.11 U11_2_1.12 U11_2_1.13 U11_2_1.14 U11_2_1.15 U11_2_1.16 U11_2_1_1.1 U11_2_1_1.2 U11_2_1_1.3 U11_2_1_1.4 U11_2_1_1.5 U11_2_1_1.6 U11_2_1_1.7 U11_2_1_1.8 U11_2_1_1.9 U11_2_1_1.10 U11_2_1_1.11 U11_2_1_1.12 U11_2_1_1.13 U11_2_1_1.14 U11_2_1_1.15 U11_2_1_1.16 U11_3.1 U11_3.2 U11_3.3 U11_3.4 U11_3.5 U11_3.6 U11_3.7 U11_3.8 U11_3.9 U11_3.10 U11_3.11 U11_3.12 U11_3.13 U11_3.14 U11_3.15 U11_3.16 U11_3_1.1 U11_3_1.2 U11_3_1.3 U11_3_1.4 U11_3_1.5 U11_3_1.6 U11_3_1.7 U11_3_1.8 U11_3_1.9 U11_3_1.10 U11_3_1.11 U11_3_1.12 U11_3_1.13 U11_3_1.14 U11_3_1.15 U11_3_1.16